# EAGLE board Tiefenentladeschutz 2 (EAGLE 7.5.0)
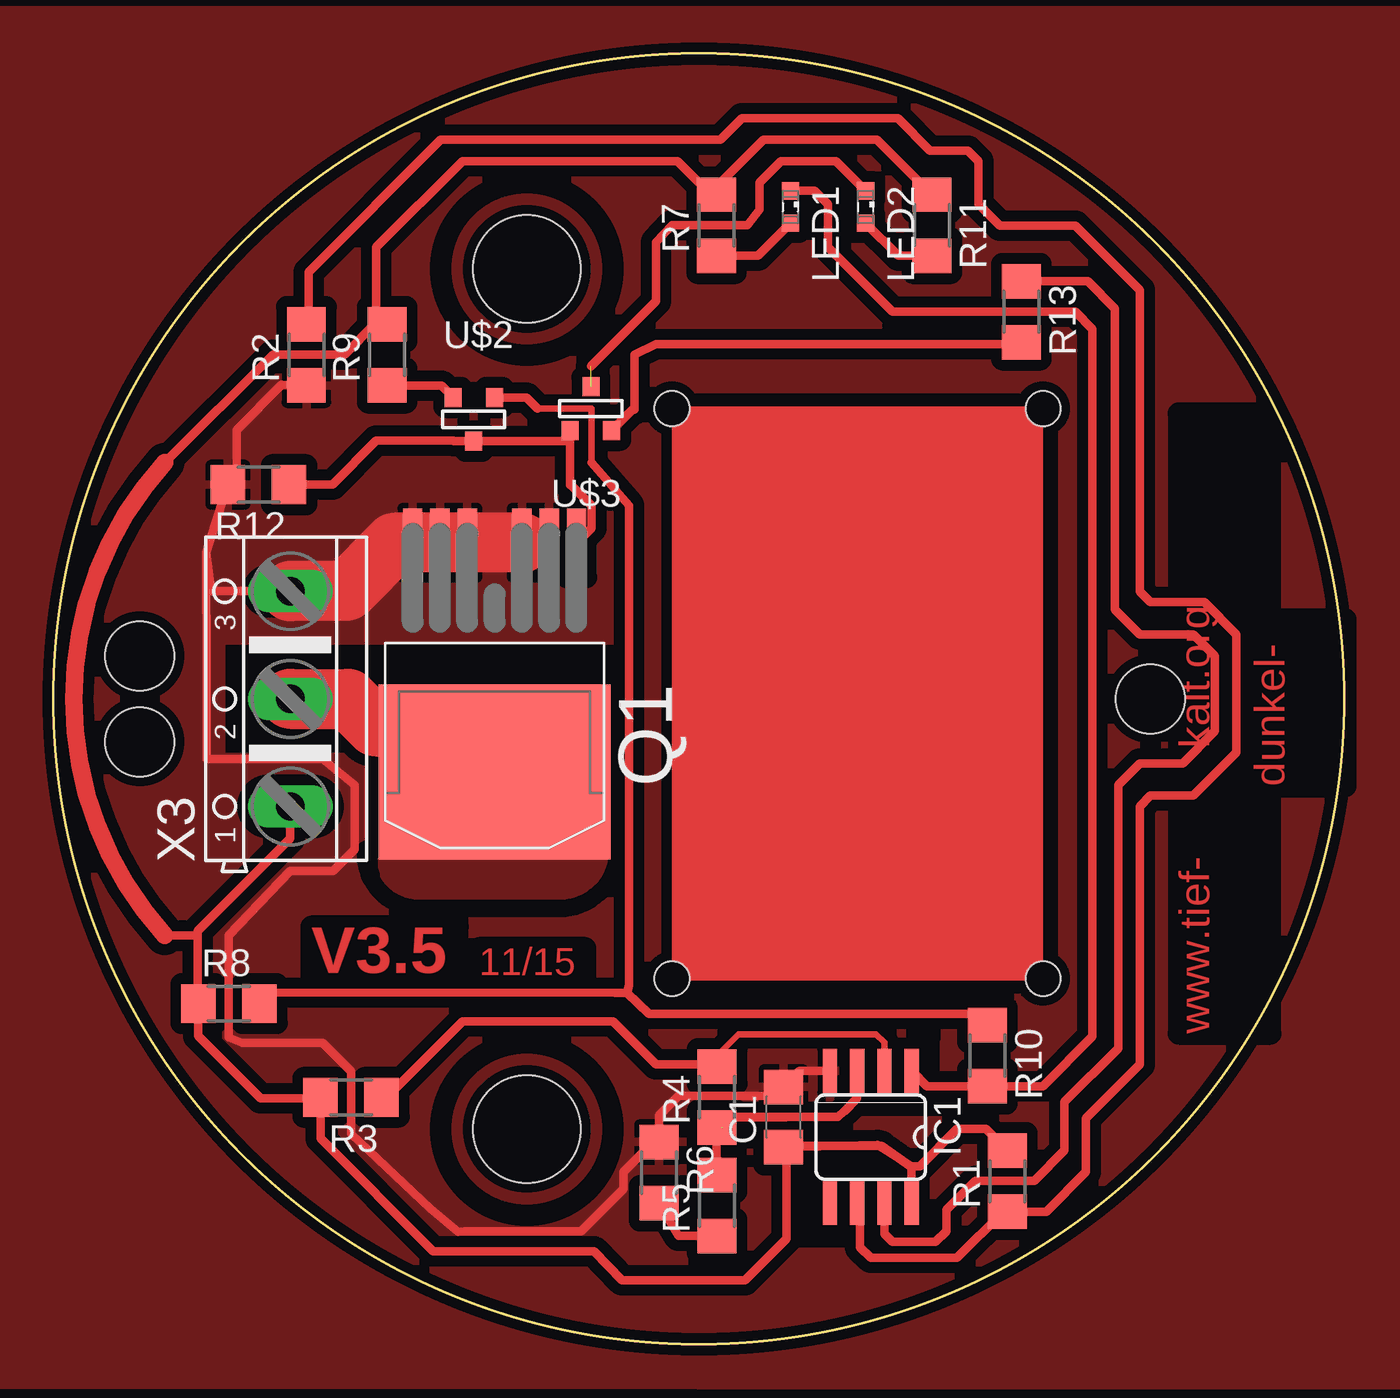
[diagram p0: board, top side]

Size 60 x 60 mm. Coordinates in mm from the lower left corner, seen from the top.
Outline: circle at 30,30 radius 30
Copper layers (1*16): Top 0.035mm / dielectric 1.5mm / Bottom 0.035mm
Design rules "default *": minimum track width 14mil, minimum drill 24mil, track to track 20mil, track to pad 20mil, pad to pad 20mil, via to via 20mil, smd to smd 8mil, copper to edge 18mil, drill to drill 18mil, minimum pad ring 10mil, minimum via ring 8mil, stop-mask expansion 4mil, vias tented up to drill 0mil, thermal gap 10mil
Holes 5 mm at 22,50 22,10
Holes 3.2 mm at 4,32 4,28 51,30
Holes 1.6 mm at 28.75,43.5 46,43.5 46,17 28.75,17
tRestrict: area 18,6 to 26,14; area 18,46 to 26,54; area 8,27.5 to 26,32.5; area 34.8,5.2 to 38.3,8.7; area 37.9,10.8 to 42,11.3; area 34.8,4.7 to 36.8,5.1; area 39.8,12.7 to 41,14.5; area 28.5,16.5 to 46.5,44; 4 lines

## Footprints (pad centres in the part's own frame; a part is rotated, then mirrored left to right if it is on the bottom)
C1206 = smd 1.6 x 1.8: 1 -1.4,0; 2 1.4,0
SO08 = smd 0.66 x 2.032: 1 -1.905,-3.073; 2 -0.635,-3.073; 3 0.635,-3.073; 4 1.905,-3.073; 5 1.905,3.073; 6 0.635,3.073; 7 -0.635,3.073; 8 -1.905,3.073
LED_SML0603 = smd 0.8 x 0.8: A 0.75,0; C -0.75,0
D2PAK-7 = smd 10.8 x 8.15: D 0,4.1 | smd 0.9 x 3.2: G -3.81,-6.56; S1 -2.54,-6.56; S2 -1.27,-6.56; S3 1.27,-6.56; S4 2.54,-6.56; S5 3.81,-6.56
R1206 = smd 1.6 x 1.803: 1 -1.422,0; 2 1.422,0
SOT-23 = smd 0.787 x 0.889: 1 0.025,-1.016; 2 -0.94,1.016; 3 0.991,1.016
AK500/3 = drill 1.321 long: 1 -5.004,0; 2 0,0; 3 5.004,0

## Placement (x,y rotation side)
C1  100 nF  [C1206]  33.94,10.55 90 top
IC1  ICL7665CSA  [SO08]  37.99,9.62 180 top
LED1  green 2mA  [LED_SML0603]  34.25,52.87 270 top
LED2  red 2mA  [LED_SML0603]  37.75,52.87 270 top
Q1  NMOSFET-D2PAK-7  [D2PAK-7]  20.5,30.7 180 top
R1  820k  [R1206]  44.34,7.58 90 top
R2  100k  [R1206]  11.75,46 90 top
R3  100k  [R1206]  13.82,11.47 180 top
R4  750k  [R1206]  30.85,11.48 90 top
R5  120k  [R1206]  30.84,6.44 90 top
R6  5,6k  [R1206]  28.14,7.97 270 top
R7  5,6k  [R1206]  30.82,52.02 90 top
R8  470k  [R1206]  8.15,15.83 0 top
R9  68k  [R1206]  15.5,46 90 top
R10  68k  [R1206]  43.42,13.41 270 top
R11  5,6k  [R1206]  40.84,52.02 270 top
R12  100k  [R1206]  9.52,39.96 180 top
R13  0  [R1206]  45,48 270 top
U$1  PIN-GENERIC  [LEER]  0.5,0.5 0 top
U$2  IRLML9301  [SOT-23]  19.5,43 0 top
U$3  IRLML6346  [SOT-23]  25,43.5 180 top
U$5  PIN-GENERIC  [LEER]  0.5,0.5 0 top
X3  [AK500/3]  11,30 90 top

## Library data of the parts
C1 = eagle-ltspice; SPICEMODEL: NONE; SPICEPREFIX: C
IC1 = maxim; MPN: ICL7665CSA+; OC_FARNELL: unknown; OC_NEWARK: 19M9537
LED1 LED2 = eagle-ltspice; SPICEMODEL: NONE; SPICEPREFIX: D; SPICETYPE: diode
Q1 = D2pak-7
R1-R13 = eagle-ltspice; SPICEMODEL: NONE; SPICEPREFIX: R
U$1-U$3 U$5 = 0liver
X3 = con-ptr500; OC_FARNELL: unknown; OC_NEWARK: unknown

## Nets
GND: C1.2 IC1.4 Q1.S1 Q1.S2 Q1.S3 Q1.S4 Q1.S5 R2.1 R6.1 R12.2 X3.3
N$1: Q1.D X3.2
N$2: IC1.3 R4.1 R5.2
N$3: R13.2 U$3.2
N$4: IC1.6 R1.1 R2.2
N$5: LED2.A R11.2
N$6: LED1.A R7.1
N$7: R8.2 R10.1 U$2.3
N$8: R9.1 U$2.2
N$11: LED2.C U$3.1
N$13: IC1.2 R3.1 R4.2
N$16: IC1.1 LED1.C R10.2
N$22: Q1.G R12.1 U$2.1 U$3.3
N$23: IC1.7 R13.1
N$26: R5.1 R6.2
V+: C1.1 IC1.8 R1.2 R3.2 R7.2 R8.1 R9.2 R11.1 X3.1

## Tracks (layer width: path | path; a pad name or v marks a point on that pad's centre or on a via)
FILL
  pour Top: -4.2,62.03 63.48,62.03 63.93,-1.94 -4.13,-1.9
GND
  Top 0.406: R6.1 28.14,10.64 29.04,11.54 33.52,11.54 C1.2 34.68,12.7 IC1.4 36.14,12.74 | 28.14,9.55 28.14,9.87 R6.1 | 7.1,36.81 R12.2 8.5,39.36 8.5,42.5 10.61,44.6 R2.1 | 7.1,36.81 7.1,31.05 7.1,27.2 12.5,27.2 14,26 14,23 13,22 11,22 8.14,19.01 8.14,14.26 8.75,14 12.51,14 13.82,12.69 13.82,9.78 17.53,6.28 18.79,5.23 19.1,5.23 24.52,5.23 26.5,7.21 26.5,8 27.89,9.39 R6.1 | 11.02,35.02 7.31,35.02 7.1,36.81 | Q1.S2 Q1.S1 Q1.S3
  Top 2.8: Q1.S2 Q1.S3 Q1.S4 Q1.S5 15.85,37.26 13.61,35.02 11.02,35.02 X3.3
  pour Top: -4.33,62.04 -4.33,-1.96 64,-2 63.5,62
N$1
  Top 2.8: X3.2 13.68,30 14.96,28.72 18.38,28.72 Q1.D
  pour Top (no thermals): 15.25,22.5 arc90 16.75,21 20,21 24.25,21 arc90 25.75,22.5
N$2  (1 unrouted)
  Top 0.4: R5.2 30.83,9.51 R4.1 31.28,9.56 31.22,10.07
  Top 0.406: IC1.3 37.36,11.43 36.76,10.83 36.75,10.83 36.48,10.56 31.34,10.56 R4.1 | 31.22,10.07 31.1,10.07 31.09,10.07 | 34.06,10.55 31.59,10.55 31.09,10.05
N$3
  Top 0.406: R13.2 45.08,46.58 45,46.5 28,46.5 27,46 27,43.45 26.91,43.45 U$3.2
N$4
  Top 0.406: IC1.6 37.5,6.41 37.5,4.5 38,4 42,4 44.16,6.16 R1.1 46.16,6.16 48,8 48,10.5 50.5,13 50.5,25 51,25.5 53,25.5 55,27.5 55,33 53.5,34.5 51,34.5 50.5,35 50.5,49 47.5,52 44,52 43,53 43,55 42.5,55.5 40.75,55.5 39.25,57 32,57 31,56 18,56 11.86,49.86 11.86,47.53 R2.2
N$5
  Top 0.406: R11.2 39.27,50.6 LED2.A
N$6
  Top 0.406: R7.1 32.74,50.6 LED1.A
N$7
  Top 0.305: 22.5,43.5 25,43.5 25,41
  Top 0.4: R8.2 9.48,16.34 26.09,16.34
  Top 0.406: 25,41 26.75,39 26.75,16.68 26.66,16.34 | 26.09,16.34 26.66,16.34 | 26.66,16.34 27.69,15.35 43.09,15.35 R10.1 | U$2.3 21.98,44.02 22.5,43.5
N$8
  Top 0.406: R9.1 18.03,44.58 18.56,44.05 U$2.2
N$11  (1 unrouted)
  Top 0.406: LED2.C 36.38,55 33.82,55 32.82,54 32.82,52.75 32.25,52.03 28.76,52.03 28,51.25 28,48.5 24.98,45.48 25,45.48
N$13
  Top 0.305: R4.2 30.85,13.39 31.85,14.41 38.24,14.41 38.62,14.02 IC1.2
  Top 0.406: R3.1 15.48,11.48 19,15 26,15 28,13 30.75,13 R4.2
N$14
  pour Top (no thermals): 21.22,38.46 23.38,38.46 23.38,36.05 21.22,36.05 21.22,38.45
N$16
  Top 0.406: 40.05,12.7 IC1.1 40.61,11.99 R10.2 | 43.41,12 R10.2 | R10.2 45.99,11.99 48.3,14.3 48.3,47.2 47.5,48 39,48 36,51 36,53 35.38,53.62 LED1.C
N$22
  Top 0.406: R12.1 12.96,39.96 15,42 18.6,42 18.6,41.98 U$2.1 24.01,41.98 | Q1.G 25,37.95 25,39 24.05,39.95 24.01,39.95 24.01,41.98 | 24.01,41.98 U$3.3
N$23
  Top 0.406: IC1.7 38.63,5.12 39,4.75 41,4.75 41.5,5.25 41.5,6.25 42.85,7.58 45.6,7.58 47,9 47,11.25 49.5,13.75 49.5,26 50.5,27 52.5,27 54,28.5 54,32 53,33 50.5,33 49.35,34.15 49.35,48.15 48.08,49.42 R13.1
N$26
  Top 0.4: R5.1 29.06,5.03 R6.2
V+
  Top 0.406: C1.1 38.31,9.25 39.89,8.27 | 39.89,8.27 39.89,6.56 IC1.8 | 39.89,8.27 39.83,8.27 38.48,9.22 34.16,9.22 34.08,9.14 34.08,4.9 32.15,2.97 26.44,2.97 25.11,4.31 17.65,4.31 12.4,9.56 R3.2 12.47,11.42 9.61,11.42 6.72,14.32 R8.1 6.7,15.85 6.7,19 | 6.7,19 6.7,19.2 11,23.5 X3.1 | 5.16,19 6.7,19 | 39.89,8.27 40.27,8.27 42,10 43.34,10 R1.2 | 5.16,41 10.2,46.02 13.52,46.02 15,47.5 15,47.92 | R11.1 38.28,56 33,56 30.82,53.82 R7.2 30.37,53 30.37,53.63 29,55 19,55 15,51 15,48 15,47.92 | 15,47.92 R9.2
  Top 0.813: 5.16,19 arc-84 5.16,41
(copper drawn outside any net)
  shapes: Top area x1

## Text on the board
Top: dunkel- | V3.5 | 11/15 | www.tief- kalt.org